# Altium PCB PCB1.PcbDoc (part 1 of 2)
Units mil, origin at the board's own origin, x right, y up, seen from the top; angles counter-clockwise.
Board outline 1637.83 x 850.42 mil, 4 copper layers (Top Layer, Signal Layer 1, Signal Layer 2, Bottom Layer), stack 30.634 mil thick; 87 components, 65 nets, 368 pads, 401 vias.
Unrouted connection lines stored in the file: 1.
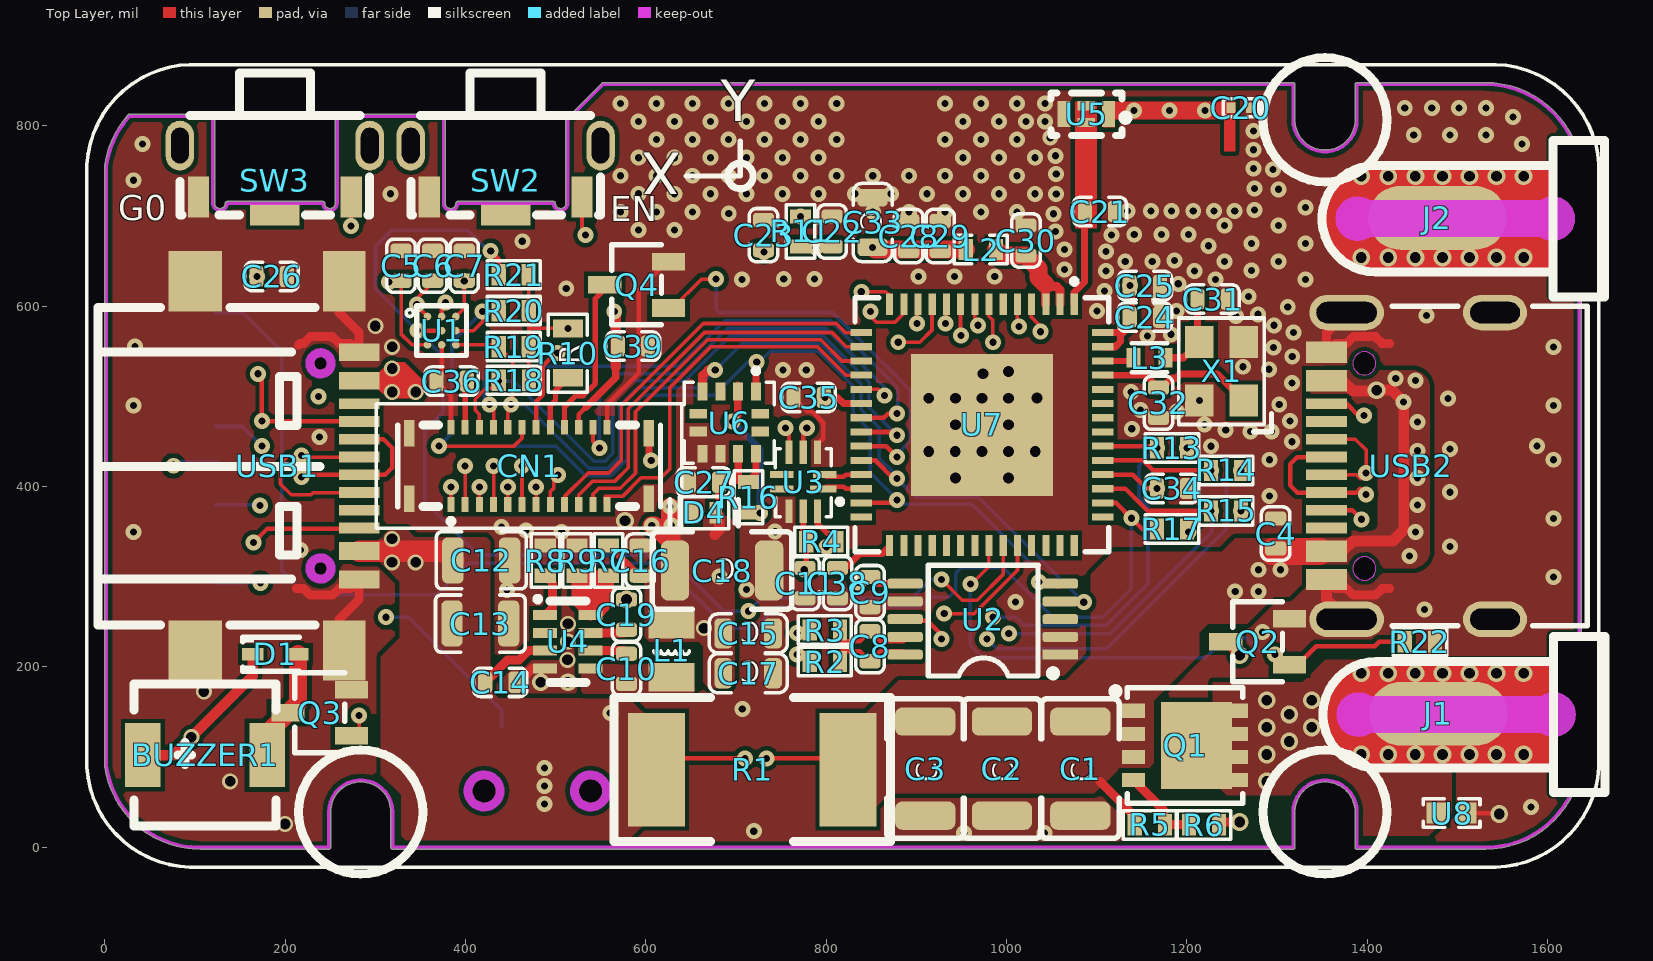
[diagram p0: Top Layer view]
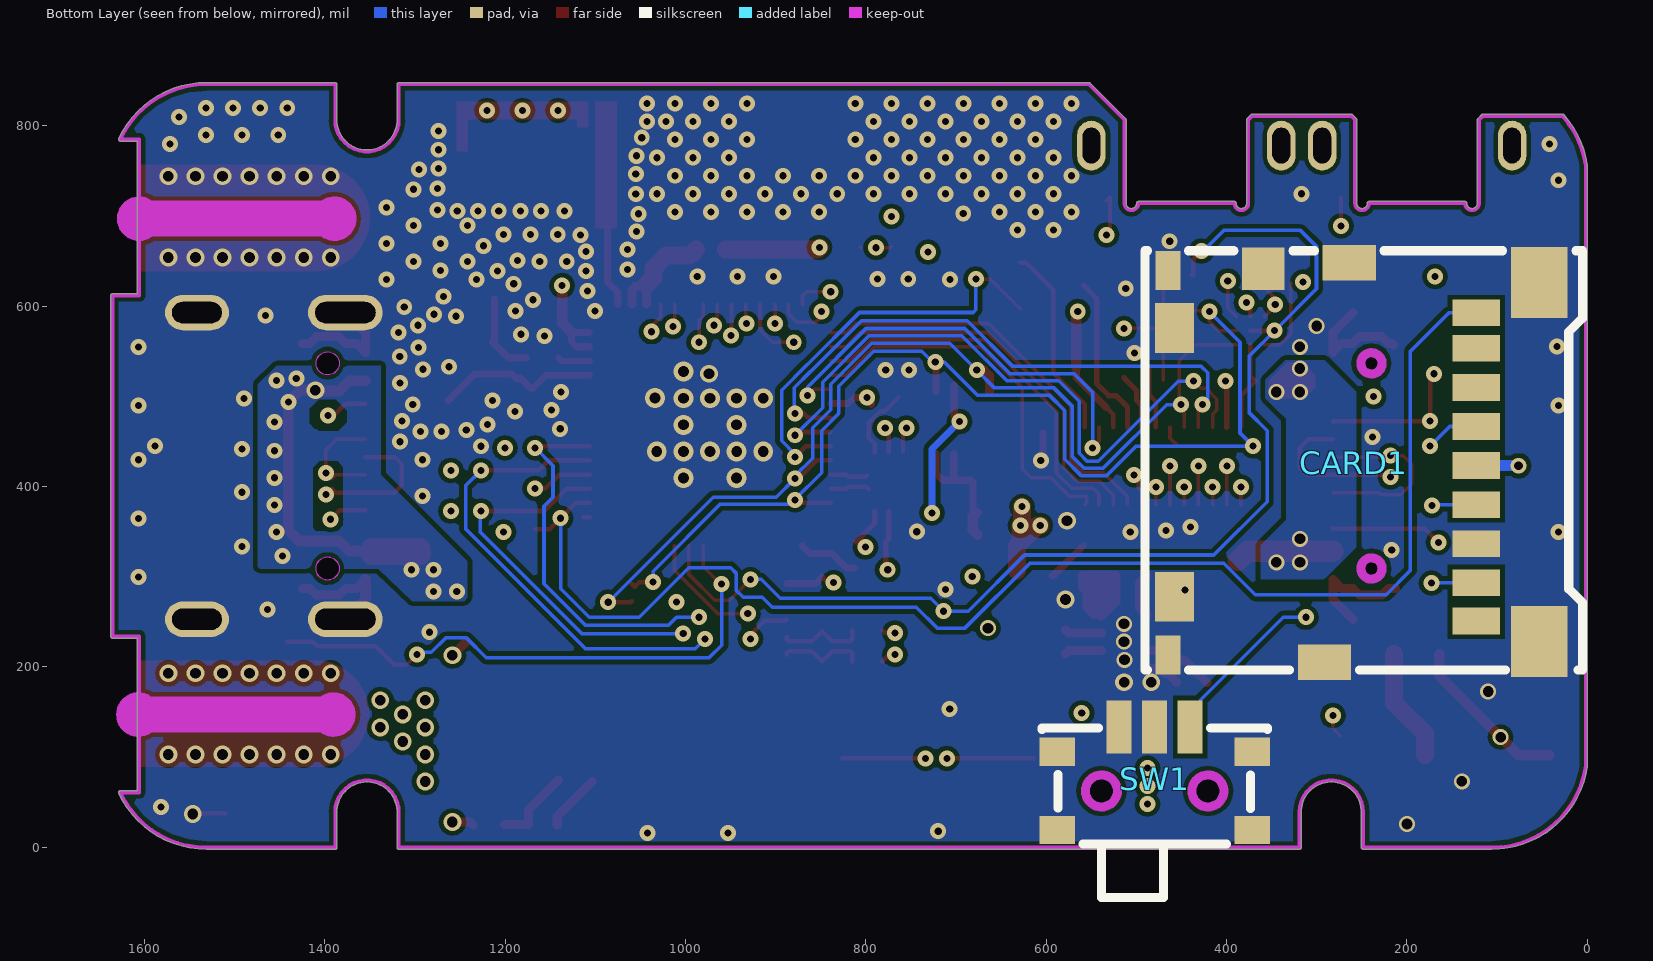
[diagram p1: Bottom Layer view, seen from below]
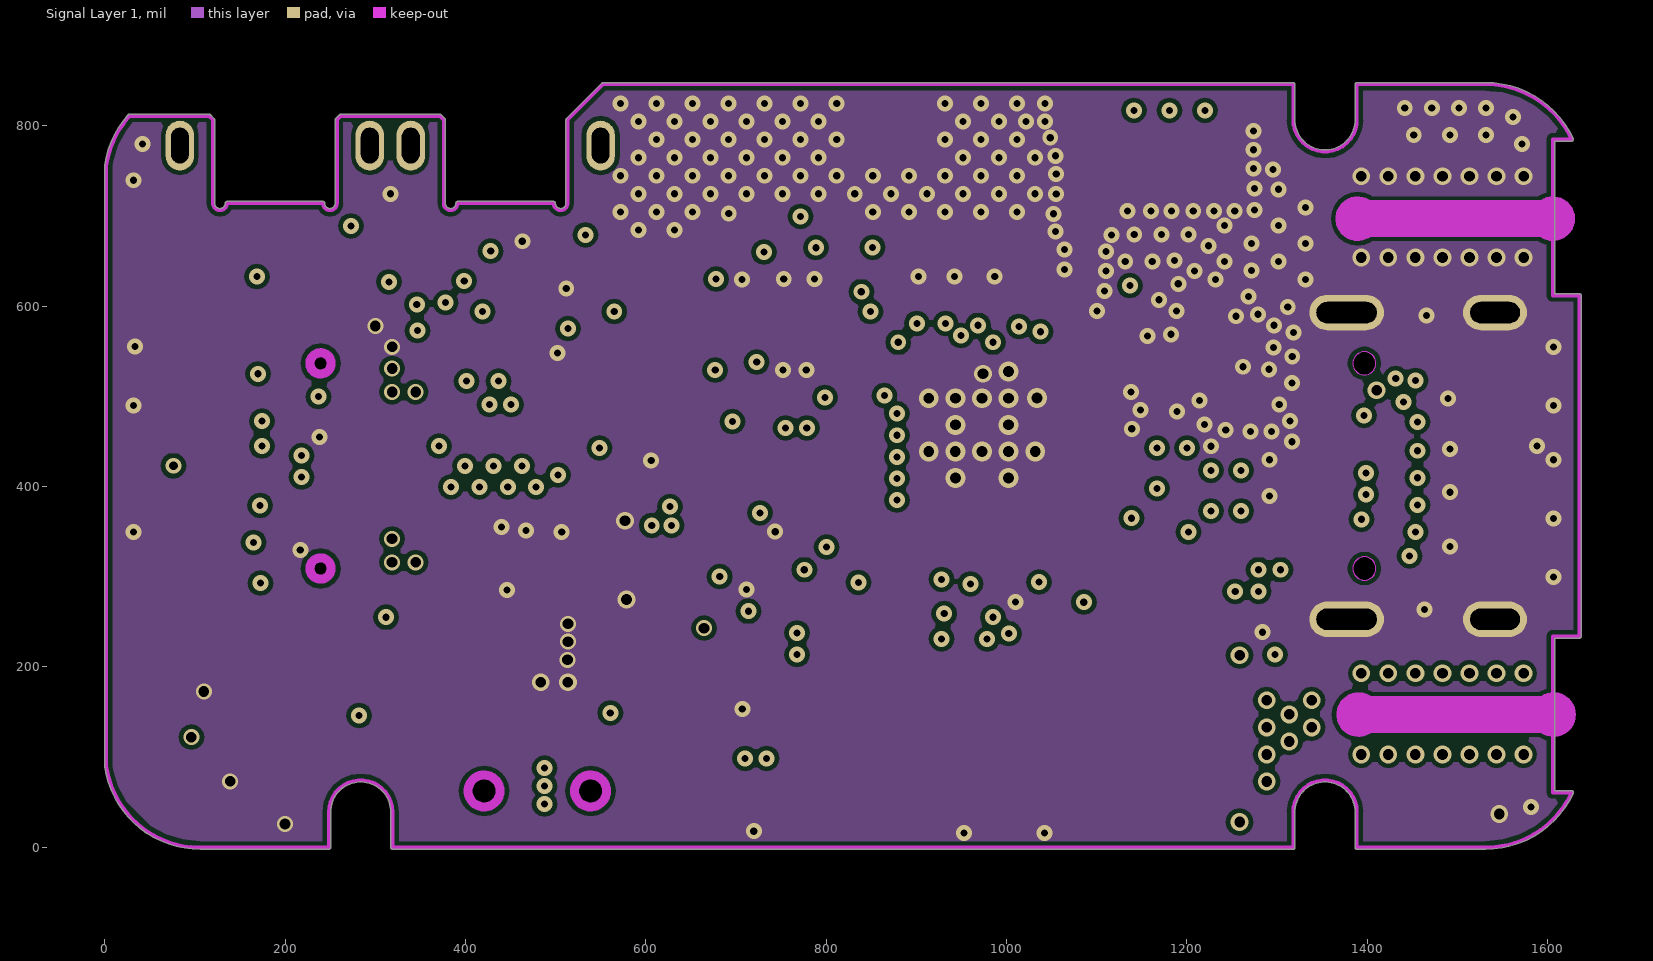
[diagram p2: Signal Layer 1]
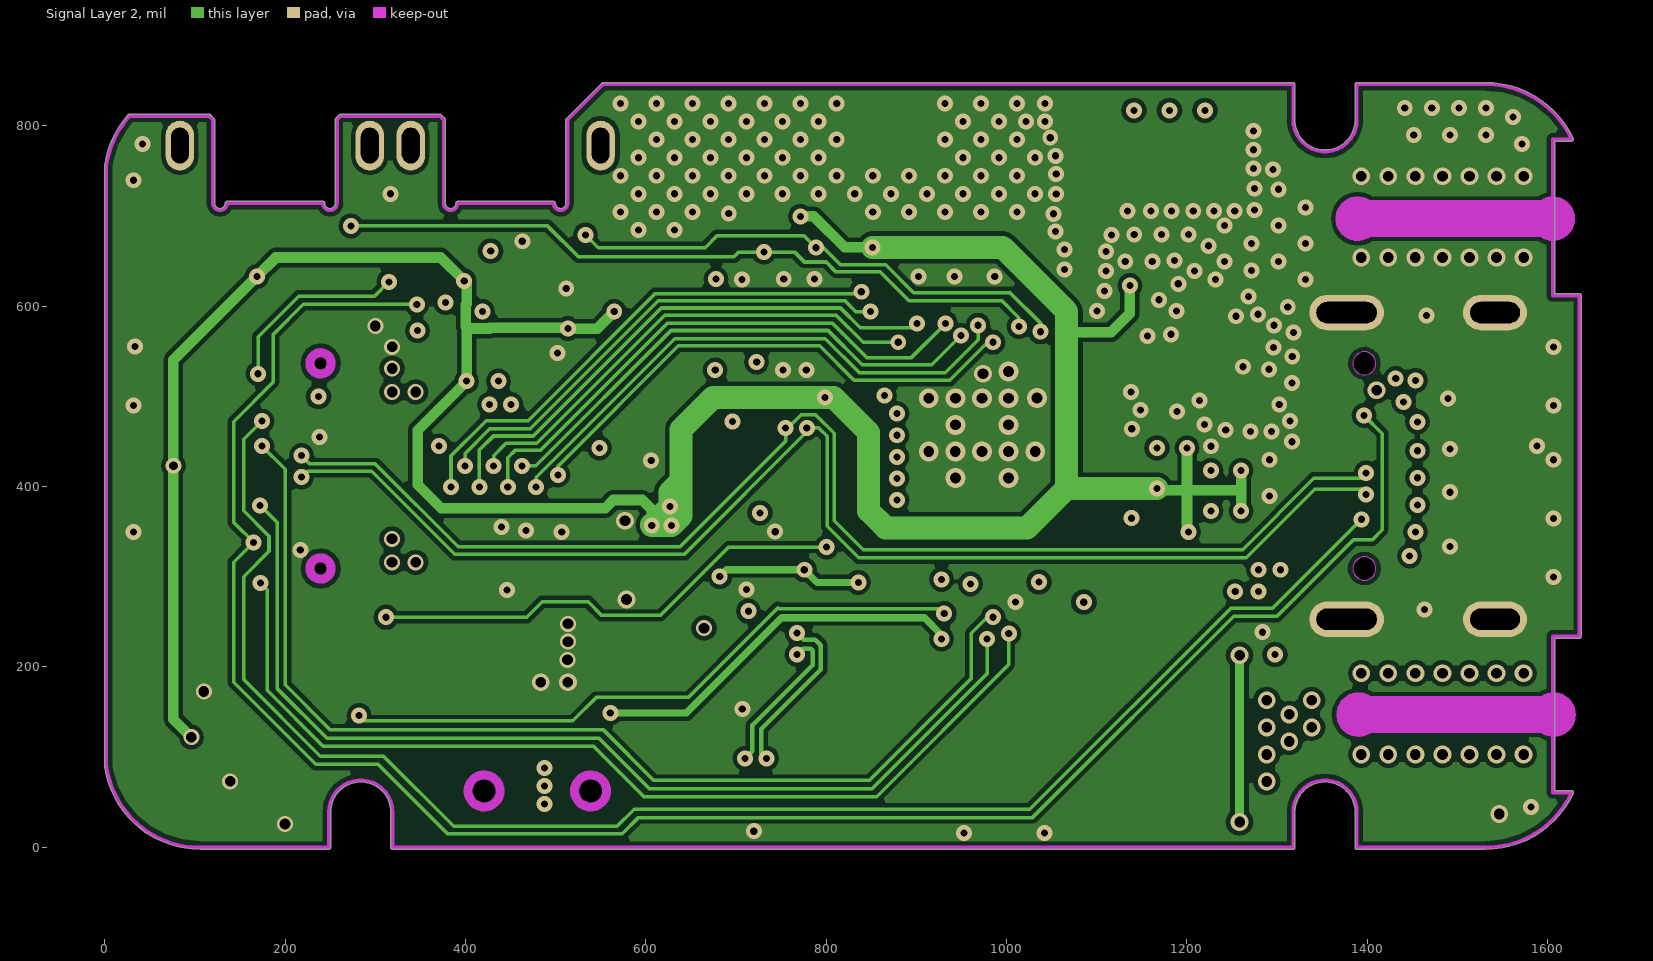
[diagram p3: Signal Layer 2]

## Layer stack, top to bottom
Top Solder: solder mask 0.4, Solder Resist, Dk 3.5
Top Layer: signal copper 1.4
Dielectric 1: core 10, FR-4, Dk 4.2
Signal Layer 1: signal copper 1.417
Dielectric 3: prepreg 5, Dk 4.2
Signal Layer 2: signal copper 1.417
Dielectric 2: core 10, Dk 4.2
Bottom Layer: signal copper 1.4
Bottom Solder: solder mask 0.4, Solder Resist, Dk 3.5

## Board outline
105.98,-2.38 248.39,-2.38 ccw(c248.39,-0.4) 250.37,-0.4 250.37,38.9 cw(c283.82,38.9) 317.27,38.9 317.27,-0.4 ccw(c319.25,-0.4) 319.25,-2.38 1317.91,-2.38 ccw(c1317.91,-0.4) 1319.9,-0.4 1319.9,38.9 cw(c1353.35,38.9) 1386.8,38.9 1386.8,-0.4 ccw(c1388.78,-0.4) 1388.78,-2.38 1531.18,-2.38 ccw(c1531.18,-0.4) 1531.2,-2.38 ccw(c1531.18,105.06) 1628.56,59.65 ccw(c1626.76,60.49) 1628.7,60.08 ccw(c1626.79,60.62) 1628.77,60.62 ccw(c1626.79,60.62) 1626.79,62.61 1607.97,62.61 1607.97,231.87 1635.51,231.87 ccw(c1635.51,233.85) 1637.5,233.85 1637.5,611.8 ccw(c1635.51,611.8) 1635.51,613.79 1607.97,613.79 1607.97,783.05 1626.79,783.05 ccw(c1626.79,785.03) 1628.77,785.03 ccw(c1626.79,785.03) 1628.7,785.58 ccw(c1626.76,785.17) 1628.55,786.01 ccw(c1531.18,740.6) 1531.2,848.04 ccw(c1531.18,846.06) 1531.18,848.04 1388.78,848.04 ccw(c1388.78,846.06) 1386.8,846.06 1386.8,806.76 cw(c1353.35,806.76) 1319.9,806.76 1319.9,846.06 ccw(c1317.91,846.06) 1317.91,848.04 552.84,848.04 ccw(c552.84,846.06) 551.42,847.45 551.43,847.46 512.06,808.09 512.07,808.1 ccw(c513.47,806.69) 511.48,806.69 511.48,714.17 cw(c505.59,714.17) 499.7,714.17 ccw(c497.72,714.17) 497.72,716.15 391.42,716.15 ccw(c391.42,714.17) 389.43,714.17 cw(c383.54,714.17) 377.65,714.17 377.65,806.69 ccw(c375.67,806.69) 377.06,808.1 377.07,808.09 372.82,812.34 372.83,812.33 ccw(c371.42,810.94) 371.42,812.92 261.81,812.92 ccw(c261.81,810.94) 260.4,812.33 260.41,812.34 256.16,808.09 256.17,808.1 ccw(c257.56,806.69) 255.58,806.69 255.58,714.17 cw(c249.69,714.17) 243.8,714.17 ccw(c241.81,714.17) 241.81,716.15 135.51,716.15 ccw(c135.51,714.17) 133.53,714.17 cw(c127.64,714.17) 121.75,714.17 121.75,806.69 ccw(c119.76,806.69) 121.16,808.1 121.17,808.09 116.91,812.34 116.93,812.33 ccw(c115.51,810.94) 115.51,812.92 27.46,812.92 ccw(c27.46,810.94) 25.98,812.26 ccw(c105.78,740.63) -0.31,756.25 ccw(c1.65,755.96) -0.33,755.96 ccw(c1.65,755.96) -0.33,755.96 -0.33,89.69 ccw(c1.65,89.69) -0.31,89.4 ccw(c105.98,105.06)

## Design rules (kind name [scope] priority, off if disabled: settings)
Clearance [All] p1: gap=4
ComponentClearance [All] p1 off: gap=10 collisioncheckmode=3 verticalgap=10 showdistances=FALSE
MinimumSolderMaskSliver [All] p1 off: minsoldermaskwidth=10
NetAntennae [All] p1 off: netantennaetolerance=0
PolygonConnect [All] p1: connectstyle=Direct reliefconductorwidth=10 reliefentries=4 polygonreliefangle="90 Angle" airgapwidth=10
RoutingVias [All] p1: holewidth=28 width=50 viastyle="Through Hole" minholewidth=7.87 minwidth=17.72 maxholewidth=28 maxwidth=50
SilkToSilkClearance [All] p1 off: silktosilkclearance=10
SilkToSolderMaskClearance [IsPad] p1 off: minsilkscreentomaskgap=10 clearancetoexposedcopper=TRUE
SolderMaskExpansion [All] p1: expansion=4
UnRoutedNet [All] p1 off:
Width [All] p1: maxlimit=100 minlimit=3 preferedwidth=10
24 further rules are at their usual default settings.

## Components (designator, comment, footprint, x,y, rotation, side; value= is the part's Value field where it differs from the comment)
BUZZER1 "4kHz" BUZ-SMD_L4.0-W4.0-P3.50-L 111.1,102 r0 top
C1 "22uF" C1206 1082,87.17 r90 top
C2 "22uF" C1206 995,87.17 r90 top
C3 "22uF" C1206 910,87.17 r90 top
C4 "100nF" C0402 1298.58,347.83 r270 top
C5 "470pF" C0402 328.58,644.83 r90 top
C6 "470pF" C0402 363.58,644.83 r270 top
C7 "100nF" C0402 398.58,644.83 r90 top
C8 "100nF" C0402 848.58,222.83 r270 top
C9 "100nF" C0402 848.58,282.83 r270 top
C10 "100nF" C0402 578.58,197.83 r90 top
C11 "100nF" C0402 776.58,292.83 r270 top
C12 "22uF" C0805 417.5,318 r180 top
C13 "22uF" C0805 416.5,248 r180 top
C14 "100nF" C0402 438.58,182.83 r0 top
C15 "22uF" C0603 713.56,237 r180 top
C16 "100nF" C0402 593.58,317.83 r90 top
C17 "22uF" C0603 713.58,192.83 r180 top
C18 "100uF" C1206 684.58,306.83 r180 top
C19 "33nF" C0402 578.58,257.83 r270 top
C20 "6.2pF" C0201 1260,820 r180 top
C21 "0.8pF" C0402 1103.73,705 r0 top
C22 "1uF" C0402 806.58,682.83 r270 top
C23 "100nF" C0402 730.58,678.83 r90 top
C24 "10nF" C0402 1153.58,587.83 r180 top
C25 "1uF" C0402 1153.58,622.83 r180 top
C26 "100nF" C0402 185,633 r0 top
C27 "100nF" C0402 664.58,404.83 r0 top
C28 "10uF" C0402 891.58,677.83 r270 top
C29 "1uF" C0402 926.58,677.83 r270 top
C30 "100nF" C0402 1021.58,672.83 r90 top
C31 "15pF" C0402 1228.58,607.83 r180 top
C32 "15pF" C0402 1168.58,492.83 r90 top
C33 "22uF" C0603 851.58,692.83 r270 top
C34 "100nF" C0402 1183.58,397.83 r0 top
C35 "100nF" C0402 780.58,498.83 r180 top
C36 "100nF" C0402 384.58,516.83 r180 top
C38 "10uF" C0402 812.58,292.83 r90 top
C39 "100nF" C0402 585.76,555.65 r0 top
CARD1 "5033981892" TF-SMD_TF-110 259.07,426.47 r90 bottom locked
CN1 "BM20B(0.8)-24DS-0.4V(51)" CONN-SMD_BM20B-0.8-24DS-0.4V-51 470.55,422.83 r0 top locked
D1 "1N4148WT" SOD-523_L1.2-W0.8-LS1.6-RD 189,214 r0 top
D4 "BDFN2C031V" TSSLP-2-4_L1.0-W0.6-P0.65-BI 664.58,370.83 r0 top
J1 "" ? 1607,147 r180 top
J2 "" ? 1605.98,697 r180 top
L1 "2.2uH" L0805 628.58,217.83 r90 top
L2 "2nH" L0402 971.58,662.83 r0 top
L3 "27nH" IND-SMD_L1.0-W0.5-2 1158.58,542.83 r0 top
Q1 "AON7405" DFN-8_L3.3-W3.3-P0.65-BL-3 1198.58,112.83 r270 top
Q2 "WNM6002-3/TR" SOT-323-3_L2.0-W1.3-P1.30-LS2.1-BR 1278.58,227.83 r0 top
Q3 "WNM6002-3/TR" SOT-323-3_L2.0-W1.3-P1.30-LS2.1-BR 238.35,149 r0 top
Q4 "WNM6002-3/TR" SOT-323-3_L2.0-W1.3-P1.30-LS2.1-BR 589.76,623.65 r0 top
R1 "10mΩ" RES-SMD_L6.3-W3.3_HOLR2512 718,86 r0 top
R2 "10Ω" R0402 798.58,205.83 r180 top
R3 "10Ω" R0402 798.58,240.83 r180 top
R4 "10kΩ" R0402 794.58,338.83 r180 top
R5 "100kΩ" R0402 1159.04,24.67 r180 top
R6 "1kΩ" R0402 1219.04,24.67 r180 top
R7 "30kΩ" R0402 558.58,317.83 r90 top
R8 "0Ω" R0402 488.58,317.83 r270 top
R9 "10kΩ" R0402 523.58,317.83 r270 top
R10 "4.7Ω" R0603 513.58,547.83 r90 top
R11 "10kΩ" R0402 771.58,682.83 r90 top
R13 "10kΩ" R0402 1183.58,442.83 r180 top
R14 "10kΩ" R0402 1243.58,417.83 r180 top
R15 "10kΩ" R0402 1243.58,372.83 r180 top
R16 "10kΩ" R0402 713.85,388.1 r90 top
R17 "10kΩ" R0402 1183.58,352.83 r0 top
R18 "4.7kΩ" R0402 453.58,517.83 r180 top
R19 "4.7kΩ" R0402 453.54,555.11 r180 top
R20 "4.7kΩ" R0402 453.54,594.99 r180 top
R21 "4.7kΩ" R0402 453.54,634.88 r180 top
R22 "4.7kΩ" R0402 1458.58,227.83 r180 top
SW1 "MINI MSK12CO2" SW-SMD_MSK12CO2 479.73,76.09 r180 bottom locked
SW2 "GT-TC021B-H018-L1" SW-SMD_GT-TC021B-H018-L1 444.57,739.76 r0 top
SW3 "GT-TC021B-H018-L1" SW-SMD_GT-TC021B-H018-L1 188.58,739.76 r0 top
U1 "FUSB302BUCX" WLCSP-9_L1.3-W1.2-R3-C3-P0.40-TL 373.58,572.83 r0 top
U2 "INA228AIDGST" VSSOP-10_L3.0-W3.0-P0.50-LS4.9-BL 973.58,252.83 r90 top
U3 "RS2227XUTQK10" WQFN-10_L1.8-W1.4-P0.40-BL 774.58,405.31 r90 top
U4 "TPS62933DRLR" SOT-583-8_L2.1-W1.2-P0.50-LS1.6-BR 513.58,227.83 r180 top
U5 "ANT162442ST-1000AM1" ANT-SMD_6P-L1.6-W0.8-L 1088.61,813 r180 top
U6 "LIS2DW12TR" LGA-12_L2.0-W2.0-P0.50-BL 692.58,470.83 r180 top
U7 "2.4GHz" QFN-56_L7.0-W7.0-P0.40-TL-EP4.0 972.86,468.39 r270 top locked
U8 "BDFN2C241R" DFN1006-2L-BI 1493.68,37.82 r180 top
USB1 "TYPEC-304A-ACP16O" USB-TYPE-C-SMD_TYPE-C-16P-QTWT 191.19,422.83 r270 top locked
USB2 "TYPEC-304A-ACP16O" USB-SMD_TYPEC-304A-ACP16O 1448.5,422.83 r90 top locked
X1 "40MHz" CRYSTAL-SMD_4P-L2.5-W2.0-BL 1238.58,527.83 r90 top

## Footprints (in the part's own frame and the unit in brackets; to place one, negate y for a bottom-side part, rotate by r counter-clockwise, add the part's x,y. Pads: shape width x height; smd on the part's side, far side on the other; paste and mask are expansions set on the pad)
ANT-SMD_6P-L1.6-W0.8-L [mm]
  rect 0.365x0.728 smd: 1(-0.625,0) 4(0.625,0)
  rect 0.5x0.26 smd paste+0 mask+0.05: 2(0,0.235) 5(0,-0.235)
  silkscreen extent -1.2,-0.6 1,0.6
BUZ-SMD_L4.0-W4.0-P3.50-L [mm]
  rect 1x1.8 smd: 1(-1.75,0) 2(1.75,0)
  silkscreen extent -2,-2 2,2
C0201 [mm]
  rect 0.25x0.3 smd: 1(-0.275,0) 2(0.275,0)
  silkscreen extent -0.5,-0.25 0.5,0.25
C0402 [mm]
  rrect50% 0.4x0.6 smd: 1(-0.425,0) 2(0.425,0)
  silkscreen extent -0.75,-0.4 0.75,0.4
C0603 [mm]
  rrect50% 0.5x0.85 smd: 1(-0.7,0) 2(0.7,0)
  silkscreen extent -1.1,-0.55 1.1,0.55
C0805 [mm]
  rrect50% 0.6x1.3 smd paste-100 mask+0.051: 1(-0.8,0) 2(0.8,0)
  silkscreen extent -1.26,-0.8 1.26,0.8
C1206 [mm]
  rrect50% 0.8x1.7 smd paste-100 mask+0.051: 1(-1.325,0) 2(1.325,0)
  silkscreen extent -1.96,-1.09 1.96,1.09
CONN-SMD_BM20B-0.8-24DS-0.4V-51 [mm]
  rect 0.2x0.42 smd: 1(-2.2,-1.09) 2(-1.8,-1.09) 3(-1.4,-1.09) 4(-1,-1.09) 5(-0.6,-1.09) 6(-0.2,-1.09) 7(0.2,-1.09) 8(0.6,-1.09) 9(1,-1.09) 10(1.4,-1.09) 11(1.8,-1.09) 12(2.2,-1.09) 13(2.2,1.09) 14(1.8,1.09) 15(1.4,1.09) 16(1,1.09) 17(0.6,1.09) 18(0.2,1.09) 19(-0.2,1.09) 20(-0.6,1.09) 21(-1,1.09) 22(-1.4,1.09) 23(-1.8,1.09) 24(-2.2,1.09)
  rect 0.3x0.75 smd: 25(3.375,-0.925) 26(3.375,0.925) 27(-3.375,-0.925) 28(-3.375,0.925)
  silkscreen extent -3.7,-1.64 3.7,1.15
CRYSTAL-SMD_4P-L2.5-W2.0-BL [mm]
  rect 0.9x0.8 smd: 1(-0.825,-0.625) 2(0.825,-0.625) 3(0.825,0.625) 4(-0.825,0.625)
  silkscreen extent -1.7,-1.41 1.5,1.2
DFN1006-2L-BI [mm]
  rect 0.55x0.6 smd: 1(-0.425,0) 2(0.425,0)
  silkscreen extent -0.8,-0.4 0.8,0.4
DFN-8_L3.3-W3.3-P0.65-BL-3 [mm]
  rect 0.4x0.65 smd paste-100 mask+0.05: 1(-0.975,-1.463) 2(-0.325,-1.463) 3(0.325,-1.463) 4(0.975,-1.463)
  rect 0.4x0.6 smd paste-100 mask+0.05: 5(0.975,1.463) 6(0.325,1.463) 7(-0.325,1.463) 8(-0.975,1.463)
  rect 2.45x2 smd paste-100 mask+0.05: 9(0,0.312)
  silkscreen extent -1.62,-2.07 1.62,1.61
IND-SMD_L1.0-W0.5-2 [mm]
  rect 0.4x0.55 smd: 1(-0.45,0) 2(0.45,0)
  silkscreen extent -0.5,-0.41 0.5,0.41
L0402 [mm]
  rect 0.4x0.6 smd: 1(-0.425,0) 2(0.425,0)
  silkscreen extent -0.75,-0.4 0.75,0.4
L0805 [mm]
  rect 0.8x1.3 smd paste-100 mask+0.051: 1(-0.75,0) 2(0.75,0)
  silkscreen extent -0.1,-0.5 0,0.5
LGA-12_L2.0-W2.0-P0.50-BL [mm]
  rect 0.28x0.5 smd: 1(-0.75,-0.875) 2(-0.25,-0.875) 3(0.25,-0.875) 4(0.75,-0.875) 7(0.75,0.875) 8(0.25,0.875) 9(-0.25,0.875) 10(-0.75,0.875)
  rect 0.5x0.28 smd: 5(0.875,-0.25) 6(0.875,0.25) 11(-0.875,0.25) 12(-0.875,-0.25)
  silkscreen extent -1.27,-1.53 1.27,1.14
QFN-56_L7.0-W7.0-P0.40-TL-EP4.0 [mm]
  rect 0.6x0.2 smd paste-100 mask+0.051: 1(-3.4,2.6) 2(-3.4,2.2) 3(-3.4,1.8) 4(-3.4,1.4) 5(-3.4,1) 6(-3.4,0.6) 7(-3.4,0.2) 8(-3.4,-0.2) 9(-3.4,-0.6) 10(-3.4,-1) 11(-3.4,-1.4) 12(-3.4,-1.8) 13(-3.4,-2.2) 14(-3.4,-2.6) 29(3.4,-2.6) 30(3.4,-2.2) 31(3.4,-1.8) 32(3.4,-1.4) 33(3.4,-1) 34(3.4,-0.6) 35(3.4,-0.2) 36(3.4,0.2) 37(3.4,0.6) 38(3.4,1) 39(3.4,1.4) 40(3.4,1.8) 41(3.4,2.2) 42(3.4,2.6)
  rect 0.2x0.6 smd paste-100 mask+0.051: 15(-2.6,-3.4) 16(-2.2,-3.4) 17(-1.8,-3.4) 18(-1.4,-3.4) 19(-1,-3.4) 20(-0.6,-3.4) 21(-0.2,-3.4) 22(0.2,-3.4) 23(0.6,-3.4) 24(1,-3.4) 25(1.4,-3.4) 26(1.8,-3.4) 27(2.2,-3.4) 28(2.6,-3.4) 43(2.6,3.4) 44(2.2,3.4) 45(1.8,3.4) 46(1.4,3.4) 47(1,3.4) 48(0.6,3.4) 49(0.2,3.4) 50(-0.2,3.4) 51(-0.6,3.4) 52(-1,3.4) 53(-1.4,3.4) 54(-1.8,3.4) 55(-2.2,3.4) 56(-2.6,3.4)
  rect 1x1 smd paste+0 mask+0: 57(-1.5,1.5) 57(-1.5,0) 57(-1.5,-1.499) 57(0,-1.499) 57(0,1.5) 57(1.5,1.5) 57(1.5,0) 57(1.5,-1.5)
  rect 4x4 smd paste-100 mask-100: 57(0,0)
  silkscreen extent -4.11,-3.58 3.58,3.58
R0402 [mm]
  rect 0.4x0.6 smd: 1(-0.425,0) 2(0.425,0)
  silkscreen extent -0.75,-0.4 0.75,0.4
R0603 [mm]
  rect 0.5x0.85 smd paste-0.05 mask+0.051: 1(-0.694,0) 2(0.694,0)
  silkscreen extent -1.1,-0.55 1.1,0.55
RES-SMD_L6.3-W3.3_HOLR2512 [mm]
  rect 1.6x3.2 smd: 1(-2.7,0) 2(2.7,0)
  silkscreen extent -3.9,-2.03 3.9,2.03
SOD-523_L1.2-W0.8-LS1.6-RD [mm]
  rect 0.6x0.36 smd: 1(-0.635,0) 2(0.635,0)
  silkscreen extent -0.91,-0.55 0.68,0.55
SOT-323-3_L2.0-W1.3-P1.30-LS2.1-BR [mm]
  rect 0.936x0.5 smd: 1(0.898,-0.65) 2(0.898,0.65) 3(-0.898,0)
  silkscreen extent -0.7,-1.13 0.7,1.13
SOT-583-8_L2.1-W1.2-P0.50-LS1.6-BR [mm]
  rect 0.68x0.28 smd: 1(0.64,-0.75) 2(0.64,-0.25) 3(0.64,0.25) 4(0.64,0.75) 5(-0.64,0.75) 6(-0.64,0.25) 7(-0.64,-0.25) 8(-0.64,-0.75)
  silkscreen extent -0.51,-1.27 0.92,1.14
SW-SMD_GT-TC021B-H018-L1 [mm]
  rect 0.6x1.15 smd paste-100 mask+0.051: 1(-2.15,-0.475) 2(2.15,-0.475)
  oval 0.8x1.4 hole 0.5 slot 1 at 90 deg: 3(-2.675,0.975) 4(2.675,0.975)
  rect 1.4x0.6 smd paste-100 mask+0.051: 3(0,-0.975)
  silkscreen extent -2.67,-0.97 2.67,3.03
SW-SMD_MSK12CO2 [mm]
  rect 0.7x1.5 smd: 1(-1,1.45) 2(0,1.45) 3(1,1.45)
  rect 1x0.8 smd: 4(-2.75,-1.45) 4(-2.75,0.75) 5(2.75,-1.45) 5(2.75,0.75)
  Keep-Out Layer board cut-out: 1.95,-0.35 1.888,-0.127 1.724,0.036 1.5,0.095 1.277,0.036 1.112,-0.127 1.05,-0.35 1.05,-0.35 1.112,-0.573 1.277,-0.736 1.5,-0.795 1.724,-0.736 1.888,-0.573 1.95,-0.35 1.95,-0.35
  Keep-Out Layer board cut-out: -1.05,-0.35 -1.112,-0.127 -1.276,0.036 -1.5,0.095 -1.723,0.036 -1.888,-0.127 -1.95,-0.35 -1.95,-0.35 -1.888,-0.573 -1.723,-0.736 -1.5,-0.795 -1.276,-0.736 -1.112,-0.573 -1.05,-0.35 -1.05,-0.35
  Multi-Layer keep-out circle w0.254: c1.5,-0.35 r0.45
  Multi-Layer keep-out circle w0.254: c-1.5,-0.35 r0.45
  silkscreen extent -3.17,-3.35 3.17,1.43
TF-SMD_TF-110 [mm]
  rect 0.75x1.35 smd: 1(3.218,-3.455) 2(2.117,-3.455) 3(1.018,-3.455) 4(-0.082,-3.455) 5(-1.182,-3.455) 6(-2.282,-3.455) 7(-3.382,-3.455) 8(-4.462,-3.455) 9(4.218,-3.455)
  rect 1.2x1.2 smd: 10(5.465,2.545)
  rect 1x1.5 smd: 11(-5.631,0.82) 11(5.631,0.12)
  rect 1.1x0.7 smd: 11(-5.414,5.23) 11(5.414,5.23)
  rect 2x1.6 smd: 11(-5.032,-5.23) 11(5.068,-5.23)
  rect 1.4x1.1 smd: 11(-3.782,5.045) 11(3.794,5.045)
  silkscreen extent -5.84,-6.44 5.97,5.88
TSSLP-2-4_L1.0-W0.6-P0.65-BI [mm]
  rect 0.35x0.6 smd: 1(-0.325,0) 2(0.325,0)
  silkscreen extent -0.96,-0.45 0.96,0.45
USB-SMD_TYPEC-304A-ACP16O [mm]
  oval 1x2.1 hole 0.6 slot 1.7 at 90 deg paste+0 mask+0.05: 12(-4.32,1.808) 13(4.32,1.808)
  oval 1x1.8 hole 0.6 slot 1.4 at 90 deg paste+0 mask+0.05: 14(-4.32,-2.372) 15(4.32,-2.372)
  rect 0.6x1.15 smd paste-100 mask+0.05: A1B12(-3.2,2.372) A4B9(-2.4,2.372) B1A12(3.2,2.372) B4A9(2.4,2.372)
  rect 0.3x1.15 smd paste-100 mask+0.05: A5(-1.25,2.372) A6(-0.25,2.372) A7(0.25,2.372) A8(1.25,2.372) B5(1.75,2.372) B6(0.75,2.372) B7(-0.75,2.372) B8(-1.75,2.372)
  Keep-Out Layer circle w0.005: c-2.89,1.307 r0.325
  Keep-Out Layer circle w0.005: c2.89,1.307 r0.325
  Keep-Out Layer board cut-out: -2.89,1.632 -2.955,1.632 -3.074,1.583 -3.166,1.492 -3.215,1.372 -3.215,1.243 -3.166,1.123 -3.074,1.032 -2.955,0.982 -2.89,0.982 -2.825,0.982 -2.706,1.032 -2.615,1.123 -2.565,1.243 -2.565,1.372 -2.614,1.492 -2.706,1.583 -2.825,1.632 -2.89,1.632 -2.89,1.632
  Keep-Out Layer board cut-out: 2.89,1.632 2.825,1.632 2.706,1.583 2.614,1.492 2.565,1.372 2.565,1.243 2.614,1.123 2.706,1.032 2.825,0.982 2.89,0.982 2.955,0.982 3.074,1.032 3.166,1.123 3.215,1.243 3.215,1.372 3.166,1.492 3.074,1.583 2.955,1.632 2.89,1.632 2.89,1.632
  silkscreen extent -4.5,-4.97 4.5,0.53
USB-TYPE-C-SMD_TYPE-C-16P-QTWT [mm]
  rect 1.7x1.2 smd: 0(-5.2,1.891) 0(5.2,1.891)
  rect 1.7x1.5 smd: 0(-5.2,-2.309) 0(5.2,-2.309)
  rect 0.5x1.14 smd: A1(-3.2,2.308) A4(-2.4,2.308) A9(2.4,2.308) A12(3.2,2.308)
  rect 0.3x1.14 smd: A5(-1.25,2.308) A6(-0.25,2.308) A7(0.25,2.308) A8(1.25,2.309) B5(1.75,2.308) B6(0.75,2.308) B7(-0.75,2.308) B8(-1.75,2.309)
  Keep-Out Layer board cut-out: 3.19,1.221 3.148,1.369 3.039,1.477 2.89,1.517 2.741,1.477 2.632,1.369 2.59,1.221 2.59,1.221 2.632,1.073 2.741,0.965 2.89,0.925 3.039,0.965 3.148,1.073 3.19,1.221 3.19,1.221
  Keep-Out Layer board cut-out: -2.59,1.221 -2.632,1.369 -2.741,1.477 -2.89,1.517 -3.039,1.477 -3.148,1.369 -3.19,1.221 -3.19,1.221 -3.148,1.073 -3.039,0.965 -2.89,0.925 -2.741,0.965 -2.632,1.073 -2.59,1.221 -2.59,1.221
  Multi-Layer keep-out circle w0.254: c2.89,1.221 r0.3
  Multi-Layer keep-out circle w0.254: c-2.89,1.221 r0.3
  silkscreen extent -4.46,-5.05 4.48,1.2
VSSOP-10_L3.0-W3.0-P0.50-LS4.9-BL [mm]
  rect 0.28x1 smd paste+0 mask+0.015: 1(-1,-2.186)
  rrect50% 0.28x1 smd paste+0 mask+0.015: 2(-0.5,-2.186) 3(0,-2.186) 4(0.5,-2.186) 5(1,-2.186)
  rrect50% 0.28x1 smd: 6(1,2.186) 7(0.5,2.186) 8(0,2.186) 9(-0.5,2.186) 10(-1,2.186)
  silkscreen extent -1.62,-2.08 1.52,1.54
WLCSP-9_L1.3-W1.2-R3-C3-P0.40-TL [mm]
  round 0.215 smd paste-100 mask+0.051: A1(-0.4,0.4) A2(0,0.4) A3(0.4,0.4) B2(0,0) B3(0.4,0) C1(-0.4,-0.4) C2(0,-0.4) C3(0.4,-0.4)
  silkscreen extent -1,-0.7 0.7,0.7
WQFN-10_L1.8-W1.4-P0.40-BL [mm]
  rect 0.2x0.75 smd: 1(-0.2,-0.565)
  rect 0.2x0.665 smd: 2(0.2,-0.608) 6(0.2,0.608) 7(-0.2,0.608)
  rect 0.665x0.2 smd: 3(0.832,-0.4) 4(0.832,0) 5(0.832,0.4) 8(-0.832,0.4) 9(-0.832,0) 10(-0.832,-0.4)
  silkscreen extent -0.99,-1.11 0.93,0.79
? [mm]
  oval 3.9x1.8 smd: 1(3.25,-0.024)
  Top Layer region: 5,-1.524 5.574,-1.41 6.061,-1.085 6.386,-0.598 6.5,-0.024 6.5,-0.024 6.386,0.55 6.061,1.037 5.574,1.362 5,1.476 5,1.476 0,1.476 0,-1.524 5,-1.524
  Keep-Out Layer board cut-out: 0,-0.5 5.5,-0.5 5.5,0.5 0,0.5 0,-0.5
  Keep-Out Layer board cut-out: 5,0 5.05,-0.217 5.188,-0.391 5.389,-0.488 5.611,-0.488 5.812,-0.391 5.951,-0.217 6,0 6,0 5.951,0.217 5.812,0.391 5.611,0.487 5.389,0.487 5.188,0.391 5.05,0.217 5,0 5,0
  Keep-Out Layer board cut-out: -0.5,0 -0.433,-0.25 -0.25,-0.432 0,-0.499 0.25,-0.432 0.433,-0.25 0.5,0 0.5,0 0.433,0.249 0.25,0.432 0,0.499 -0.25,0.432 -0.433,0.25 -0.5,0 -0.5,0
  Keep-Out Layer lines w1: 5.5,0 0,0 5.5,0
  Multi-Layer keep-out circle w0.254: c5.5,0 r0.5
  Multi-Layer keep-out circle w0.254: c0,0 r0.5
  Multi-Layer keep-out region: 0,-0.5 5.5,-0.5 5.5,0.5 0,0.5 0,-0.5
  silkscreen extent -1.45,-2.2 6.5,2.2

## Part data
BUZZER1: library part FUET-4020, "驱动方式:无源(外部驱动);构造类型:电磁式;频率:4kHz;声压(SPL):65dB@3V,10cm;"
C1 C2 C3: library part HGC1206R5226K250NSPJ, "容值:22uF;精度:±10%;额定电压:25V;材质(温度系数):X5R;"
C4 C7 C8 C9 C10 C11 C14 C16 C23 C26 C27 C30 C34 C35 C36 C39: library part CL05B104KB54PNC, "容值:100nF;精度:±10%;额定电压:50V;材质(温度系数):X7R;"
C5 C6: library part 0402B471K500NT, "容值:470pF;精度:±10%;额定电压:50V;材质(温度系数):X7R;"
C12 C13: library part CL21A226MAYNNNE, "容值:22uF;精度:±20%;额定电压:25V;材质(温度系数):X5R;"
C15 C17 C33: library part CL10A226MP8NUNE, "容值:22uF;精度:±20%;额定电压:10V;材质(温度系数):X5R;"
C18: library part CL31A107MQHNNNE, "容值:100uF;精度:±20%;额定电压:6.3V;材质(温度系数):X5R;"
C19: library part CC0402KRX7R9BB333, "容值:33nF;精度:±10%;额定电压:50V;材质(温度系数):X7R;"
C20 C21: library part GJM0335C1ER80WB01D, "容值:0.8pF;额定电压:25V;材质(温度系数):C0G;"
C22 C25 C29: library part CL05A105KP5NNNC, "容值:1uF;精度:±10%;额定电压:10V;材质(温度系数):X5R;"
C24: library part CL05B103KB5NNNC, "容值:10nF;精度:±10%;额定电压:50V;材质(温度系数):X7R;"
C28 C38: library part CL05A106MQ5NUNC, "容值:10uF;精度:±20%;额定电压:6.3V;材质(温度系数):X5R;"
C31 C32: library part 0402CG150J500NT, "容值:15pF;精度:±5%;额定电压:50V;材质(温度系数):C0G;"
CARD1: "卡连接方式:自弹式;卡类型:MicroSD卡(TF卡);连接器类型:卡座;本体最大高度:1.28mm;触头镀层:金;工作温度范围:-25℃~+85℃;"
CN1: "PIN总数:-;间距:0.4mm;公母:母;安装方式:立贴;行数:2;额定电流:300mA;工作温度范围:-35℃~+85℃;"
D1: library part 1N4148WT_C727112, "二极管配置:独立式;正向压降(Vf):1.25V@150mA;直流反向耐压(Vr):75V;平均整流电流(Io):125mA;反向恢复时间(trr):4ns;"
D4: "反向截止电压(Vrwm):3.3V;最大钳位电压:8V;峰值脉冲电流(Ipp)@10/1000us:11A@8/20us;击穿电压:3.7V;"
J1 J2: library part Banana_M2xφ4.4x7, "K2台阶插座,Banana_M2xφ4.4x7"
L1: library part MLP2012H2R2MT0S1, "电感值:2.2uH;精度:±20%;额定电流:1A;"
L2: library part SDCL1005C2N0STDF, "电感值:2nH;精度:-;额定电流:300mA;饱和电流(Isat):-;直流电阻(DCR):200mΩ;"
L3: library part LQW15AN27NG00D, "电感值:27nH;精度:±2%;额定电流:280mA;饱和电流(Isat):-;"
Q1: "类型:1个P沟道;漏源电压(Vdss):30V;连续漏极电流(Id):50A;功率(Pd):6.25W;导通电阻(RDS(on)@Vgs,Id):6.2mΩ@10V,20A;阈值电压(Vgs(th)@Id):2.8V@250uA;"
Q2 Q3 Q4: "类型:N沟道;漏源电压(Vdss):60V;连续漏极电流(Id):300mA;功率(Pd):370mW;导通电阻(RDS(on)@Vgs,Id):2Ω@10V,370mA;阈值电压(Vgs(th)@Id):2V@250uA;"
R1: library part HoLR2512-1W-10mR-1%-15ppm, "电阻类型:采样电阻;阻值:10mΩ;精度:±1%;功率:1W;温度系数:±15ppm/℃;安装方式:贴片;"
R2 R3: library part 0402WGF100JTCE, "电阻类型:厚膜电阻;阻值:10Ω;精度:±1%;功率:62.5mW;最大工作电压:50V;温度系数:±200ppm/℃;"
R4 R9 R11 R13 R14 R15 R16 R17: library part 0402WGF1002TCE, "电阻类型:厚膜电阻;阻值:10kΩ;精度:±1%;功率:62.5mW;最大工作电压:50V;温度系数:±100ppm/℃;"
R5: library part 0402WGF1003TCE, "电阻类型:厚膜电阻;阻值:100kΩ;精度:±1%;功率:62.5mW;最大工作电压:50V;温度系数:±100ppm/℃;"
R6: library part 0402WGF1001TCE, "电阻类型:厚膜电阻;阻值:1kΩ;精度:±1%;功率:62.5mW;最大工作电压:50V;温度系数:±100ppm/℃;"
R7: library part 0402WGF3002TCE, "电阻类型:厚膜电阻;阻值:30kΩ;精度:±1%;功率:62.5mW;最大工作电压:50V;温度系数:±100ppm/℃;"
R8: library part 0402WGF0000TCE, "电阻类型:厚膜电阻;阻值:0Ω;精度:±1%;功率:62.5mW;最大工作电压:50V;温度系数:±800ppm/℃;"
R10: library part 0603WAF470KT5E, "电阻类型:厚膜电阻;阻值:4.7Ω;精度:±1%;功率:100mW;最大工作电压:75V;温度系数:±400ppm/℃;"
R18 R19 R20 R21 R22: library part 0402WGF4701TCE, "电阻类型:厚膜电阻;阻值:4.7kΩ;精度:±1%;功率:62.5mW;最大工作电压:50V;温度系数:±100ppm/℃;"
SW1: "电路结构:单刀双掷;安装方式:卧贴;开关颜色:-;额定电流(DC):50mA;额定电压(DC):12V;额定电流(AC):-;额定电压(AC):-;机械寿命:1万次;"
SW2 SW3: "电路结构:单刀单掷;按钮形状:矩形按钮;作用力:250gf;安装方式:卧贴;开关长度:5.6mm;开关宽度:4mm;开关高度:1.8mm;带支架:带支架;触点电流:50mA;额定电压(DC):12V;绝缘电阻:100MΩ;带灯:无;机械寿命:5万次;"
U1: "应用功能:控制器;接口协议:USB;"
U3: "开关电路:-;"
U4: "功能类型:降压型;输出类型:可调;输入电压:3.8V~30V;输出电压:800mV~22V;输出电流(最大值):3A;"
U5: "天线类型:芯片天线;中心频点:2.442GHz;驻波比:3;"
U7: library part ESP32-S3FH4R2, "核心处理器:LX7芯片;频率:2.4GHz;天线形式:-;发射功率:21dBm;接收灵敏度:-;"
U8: "反向截止电压(Vrwm):24V;"
USB1 USB2: "连接器类型:Type-C;标准:USB 3.1;公母:母;端口数量:1;触点数量:16P;安装方式:卧贴;额定电流 - 电源:5A;触头材质:-;触头镀层:-;工作温度范围:-45℃~+85℃;焊接温度(最大值):260℃;"
X1: library part TXM40M0004252HBCEO00T, "晶振类型:贴片晶振;频率:40MHz;常温频差:±10ppm;外接负载电容:15pF;频率稳定度(全温):±30ppm;"

## Via types
v1: diameter 17.72, hole 7.87, Top Layer to Bottom Layer, 324 vias
v2: diameter 19.68, hole 11.81, Top Layer to Bottom Layer, 43 vias
v3: diameter 17.72, hole 11.81, Top Layer to Bottom Layer, 16 vias
v4: diameter 22, hole 12, Top Layer to Bottom Layer, 15 vias
v5: diameter 19.68, hole 12.01, Top Layer to Bottom Layer, 2 vias
v6: diameter 17.72, hole 9.84, Top Layer to Bottom Layer, 1 vias

## Nets (pads, with @x,y where several pads share a name; then routed paths per layer and width w, separated by ;. In a path a pad name is that pad's centre, name@x,y a point inside that pad or via, vN(x,y) a via of type N, cw(c..) or ccw(c..) an arc to the next point about the centre after c; other vN are vias at no path point)
+3V3: BUZZER1.1 C7.1 C9.1 C11.1 C15.2 C16.1 C17.2 C18.2 C24.2 C25.2 C26.1 C27.2 C28.2 C29.2 C33.2 C34.1 C35.1 C36.1 C39.1 CARD1.4 CN1.15 CN1.23 D1.1 D4.2 L1.2 L2.1 R4.2 R7.2 R10.2 R11.2 R13.1 R14.1 R15.1 R16.2 R17.2 R18.1 R19.1 R20.1 R21.1 U1.A3 U2.6 U3.9 U6.9 U6.10 U7.20 U7.46 U7.55 U7.56 | length 4883.1
  Top Layer w3.94: v1(835.76,293.65) 842.68,293.65 C9.1@848.58,299.56
  Top Layer w4: U1.A3@389.33,588.57 398.58,597.83 C7.1@398.58,626.1 ; R18.1@470.32,517.83 470.32,575.69 ; R21.1@470.32,634.84 470.32,575.69 ; v1(513.58,575.15) 513.04,575.69 470.32,575.69
  Top Layer w5: CN1.15@525.67,465.74 525.67,479.91 533.56,487.8 ; U7.46@1106.45,413.19 1140.22,413.19 1155.58,397.83 v1(1166.85,397.83)
  Top Layer w5.91: CN1.23@399.69,465.74 399.69,515.2 v1(401.32,516.83)
  Top Layer w6.02: U3.9@774.58,372.54 774.58,342.1 R4.2@777.85,338.83 777.85,310.83 C11.1@776.58,309.56
  Top Layer w7.87: C35.1@793.58,491.1 793.58,493.83 v1(798.58,498.83) 812.58,498.83 819.48,491.93 U7.20@838.74,491.93 ; C9.1@848.58,299.56 855.95,292.19 U2.6@887.52,292.19
  Top Layer w8: 533.56,487.8 566.76,521 566.76,532.99 ; R7.2@558.58,334.56 592.05,301.1 C16.1@593.58,301.1 ; D4.2@677.38,370.83 681.32,374.77 C27.2@681.32,404.83 683.32,406.83 698.58,406.83 ; U6.9@702.42,436.38 702.42,410.67 698.58,406.83 ; U6.10@722.11,436.38 722.11,414.36 714.58,406.83 698.58,406.83 ; U7.55@1106.45,554.93 1120.69,554.93 1126.58,560.83 1126.58,570.52 1126.43,570.67 U7.56@1106.45,570.67
  Top Layer w11.81: BUZZER1.1@42.2,102 76,102 v3(96,122) 164,190 D1.1@164,214 ; 676.58,346.83 681.38,351.62 681.38,366.83 D4.2@677.38,370.83 ; 1126.43,570.67 1136.85,581.1 C24.2@1136.85,587.83 v1(1136.85,622.83)
  Top Layer w12: v1(565,594) 566.76,592.24 566.76,532.99
  Top Layer w20: v1(606.58,356.83) 609.72,356.83 C18.2@626.78,339.77 ; v1(626.78,377.79) C18.2@626.78,339.77 ; v1(628.58,356.83) C18.2@628.58,337.97 ; C18.2@632.42,306.83 632.42,334.13 C18.2@628.58,337.97 ; v1(851.58,665.27) 854.02,662.83 926.58,662.83 L2.1@954.85,662.83 ; C18.2@626.78,339.77 C18.2@628.58,337.97
  Signal Layer 2 w7.87: v1(682,300) 689.65,307.65 v1(775.76,307.65) 789.76,293.65 v1(835.76,293.65)
  Signal Layer 2 w11.81: v3(96,122) 76,142 v6(76,423) 76,540.24 v1(168.58,632.83) 189.76,654 372.68,654 v1(398.58,628.1) 401.32,625.36 401.32,602.85 400.24,601.77 400.24,577.08 401.32,576 ; v1(565,594) 546.15,575.15 v1(513.58,575.15) 512.73,576 427.54,576 426.77,575.24 402.08,575.24 401.32,576 ; v1(606.58,356.83) 606.58,357.59 606.58,374.42 596,385 564,385 555,376 373,376 347,402 347,462.51 v1(401.32,516.83) 401.32,576 ; v1(771.58,699.56) 786.44,699.56 820.73,665.27 v1(851.58,665.27) ; 1066.83,571 1116,571 1136.85,591.85 v1(1136.85,622.83) ; v1(1166.85,397.83) 1168.68,396 1200.32,396 ; v1(1200.32,442.83) 1200.32,396 ; v1(1201.76,349.65) 1200.32,351.1 1200.32,396 ; v1(1260.32,372.83) 1260.32,396 ; v1(1260.32,417.83) 1260.32,396 ; 1200.32,396 1260.32,396
  Signal Layer 2 w25.59: v1(606.58,356.83) v1(628.58,356.83) ; v1@606.58,357.59 v1(626.78,377.79) ; 628.58,391.17 v1@628.58,375.99 ; v1(851.58,665.27) 995.73,665.27 1066.83,594.17 1066.83,571 1066.83,397.83 ; v1(1166.85,397.83) 1066.83,397.83 ; v1(626.78,377.79) v1@628.58,375.99 ; v1(626.78,377.79) 626.78,393.78 639,406 ; v1(628.58,356.83) 639,367.24 639,406 ; v1(628.58,356.83) v1@628.58,375.99 ; 639,406 639,463 674.83,498.83 v1(798.58,498.83) 808.17,498.83 847,460 847,373 866,354 1023,354 1066.83,397.83
  Bottom Layer w11.81: v6(76,423) 76.23,423.23 CARD1.4@123.03,423.23
  other v3: 664.58,242.83
BUZZ: Q3.1 U7.38 | length 860.8
  Top Layer w3.94: Q3.1@273.7,123.41 282,131.71 v1(282,146) ; v1(931,259) 964,259 1012.23,307.23 U7.38@1012.23,334.53
  Signal Layer 2 w3.94: v1(282,146) 288,140 519,140 545,166 647,166 746.65,265.65 747.95,264.36 925.64,264.36 v1(931,259)
CC1: C5.1 U1.C1 USB1.A5 USB2.A5 | length 2274.4
  Top Layer w4: C5.1@328.58,626.1 328.58,569.07 340.57,557.08 U1.C1@357.84,557.08
  Top Layer w5: v1(170,525) 174.21,520.79 v1(174.21,472.44) 280.89,472.44 281.28,472.83 USB1.A5@282.07,472.04 ; USB2.A5@1355.1,373.62 1383.79,373.62 v1(1393.76,363.65)
  Signal Layer 2 w3.94: v1(174.21,472.44) 154,452.23 154,373 182.06,344.94 182.06,328.06 154,300 154,186 239,101 309,101 387,23 568,23 587,42 1026,42 1249,265 1295.1,265 v1(1393.76,363.65)
  Signal Layer 2 w4: v1(170,525) 170,566 215,611 299,611 v1(315,627)
CC2: C6.2 U1.A1 USB1.B5 USB2.B5 | length 2434.2
  Top Layer w4: U1.A1@357.84,588.57 346,600.41 v1(346,602) 346,608.51 C6.2@363.58,626.1
  Top Layer w5: v1(165,338) 180.35,353.35 280.45,353.35 280.97,352.83 USB1.B5@282.07,353.93 ; USB2.B5@1355.1,491.73 1377.27,491.73 1390.17,478.83 v1(1396.58,478.83)
  Signal Layer 2 w3.94: v1(346,602) 220,602 187,569 187,516 143,472 143,360 v1(165,338) 143,316 143,183 234,92 303,92 380,15 574,15 591.83,32.83 1028.83,32.83 1252,256 1300,256 1385,341 1406,341 1417,352 1417,458.41 v1(1396.58,478.83)
CHIP_PU: C22.2 R11.1 SW2.2 U7.4 | length 669.1
  Top Layer w3.94: v1(533,679) 529.21,682.79 SW2.2@529.21,721.06 SW2.2@533.27,717 ; R11.1@771.58,666.1 772.85,664.83 v1(788.58,664.83) ; C22.2@805.32,664.83 C22.2@806.58,666.1
  Top Layer w4: U7.4@1027.72,602.18 1027.72,587.69 1037.76,577.65 v1(1037.76,571.65)
  Signal Layer 2 w4: v1(533,679) 547.17,664.83 665.83,664.83 679,678 775.41,678 v1(788.58,664.83) 797.17,664.83 816,646 866,646 897,615 1004,615 1037.76,581.24 v1(1037.76,571.65)
EUSB_N: U3.2 U7.25 | length 42
  Top Layer w5: U3.2@798.5,412.7 800.39,410.82 819.55,410.82 821.93,413.19 U7.25@838.74,413.19
EUSB_P: U3.1 U7.26 | length 44.6
  Top Layer w5: U3.1@796.83,397.44 796.83,396.96 799.7,399.83 819.55,399.83 821.93,397.45 U7.26@838.74,397.45
EXT_ADC: U7.6
EXT_IO1: U7.39
EXT_IO2: U7.40
EXT_IO3: U7.41
EXT_IO4: U7.42
EXT_IO5: U7.43 | length 7.1
  Top Layer w5: U7.43@1106.45,365.95 U7.43@1113.53,365.95
FU_INT: R21.2 U1.B2 U7.37 | length 1288
  Top Layer w3.94: v1(928,297) 951,274 967.78,274 996.22,302.45 U7.37@996.22,334.46
  Top Layer w5: v1(346.58,572.83) U1.B2@373.59,572.82 ; v1(428,661) 436.81,652.19 R21.2@436.81,634.88 R21.2@438.54,634.88
  Bottom Layer w3.94: v1(428,661) 428,659 403,684 318,684 300.17,666.17 300.17,619.24 v1(346.58,572.83) 375,544.41 375,482 355,462 355,383 414,324 624,324 686.35,261.65 v1(713.76,261.65) 728.1,276 895,276 916,297 v1(928,297)
G0: C23.1 SW3.2 U7.5 | length 861.1
  Top Layer w3.94: v1(273,689) 273,720.83 SW3.2@273.23,721.06
  Top Layer w4: U7.5@1011.97,602.18 1011.97,579.44 v1(1013.76,577.65)
  Signal Layer 2 w4: v1(273,689) 491,689 525,655 698,655 703,660 v1(731,660) ; v1@726,655 v1(731,660) ; v1(1013.76,577.65) 1013.76,587.24 995,606 892,606 860,638 811,638 800,649 776,649 765,660 v1(731,660)
G2: CN1.8 U7.7 | length 661
  Top Layer w3.94: CN1.8@494.17,379.92 494.18,394.42 498.11,398.36 498.11,408.36 v1(502.58,412.83) ; U7.7@980.47,602.18 980.47,588.94 985,584.41 v1(985,560)
  Signal Layer 2 w3.94: v1(502.58,412.83) 502.58,422.58 636,556 793,556 831,518 937.22,518 979.22,560 v1(985,560)
G3: CN1.7 U7.8 | length 656.4
  Top Layer w3.94: CN1.7@478.43,379.92 v1(478.43,399.6) ; U7.8@964.72,602.18 964.72,582.69 v1(968.58,578.83)
  Signal Layer 2 w3.94: v1(478.43,399.6) 478.43,410.43 632,564 799,564 837,526 932,526 968.58,562.58 v1(968.58,578.83)
G4: CN1.6 U7.9 | length 656.1
  Top Layer w3.94: CN1.6@462.68,379.92 v1(462.68,422.83)
  Top Layer w4: U7.9@948.98,602.18 948.98,567.82 v1(949.49,567.32)
  Signal Layer 2 w3.94: v1(462.68,422.83) 477.83,422.83 628,573 802,573 840,535 917.17,535 v1(949.49,567.32)
G5: CN1.5 U7.10 | length 652.4
  Top Layer w3.94: CN1.5@446.93,379.92 v1(446.93,399.6)
  Top Layer w4: v1(932.58,580.83) 933.23,581.48 U7.10@933.23,602.18
  Signal Layer 2 w4: v1(446.93,399.6) 446.93,431.93 455,440 483,440 624,581 807,581 845,543 894.76,543 v1(932.58,580.83)
G6: CN1.4 U7.11 | length 653.6
  Top Layer w3.94: CN1.4@431.18,379.92 v1(431.18,422.83)
  Top Layer w4: v1(880,560) 904,560 917.48,573.48 U7.11@917.48,602.18
  Signal Layer 2 w3.94: v1(431.18,422.83) 431.18,434.18 445,448 479,448 621,590 811,590 841,560 v1(880,560) v1@881.76,560
G7: CN1.3 U7.12 | length 643.9
  Top Layer w3.94: CN1.3@415.43,379.92 v1(415.43,399.6)
  Top Layer w4: v1(900.58,580.83) 900.58,601.03 U7.12@901.73,602.18
  Signal Layer 2 w4: v1(415.43,399.6) 415.43,440.43 431,456 475,456 617,598 816,598 838,576 895.76,576 v1(900.58,580.83)
G8: CN1.2 U7.13 | length 640.4
  Top Layer w3.94: CN1.2@399.69,379.92 v1(399.69,422.83)
  Top Layer w4: v1(849,594) 849,589 856,582 876,582 885.98,591.98 U7.13@885.98,602.18
  Signal Layer 2 w3.94: v1(399.69,422.83) 399.69,436.69 427,464 471.73,464 613.73,606 821,606 833,594 v1(849,594)
G9: CN1.1 U7.14 | length 628.8
  Top Layer w3.94: CN1.1@383.94,379.92 v1(383.94,399.6)
  Top Layer w4: v1(839,616) 866,616 870.24,611.76 U7.14@870.24,602.18
  Signal Layer 2 w4: v1(383.94,399.6) 383.94,433.94 423,473 469.46,473 610.46,614 839.41,614 839,614.41 v1(839,616)
G10: CN1.9 U7.15 | length 457.1
  Top Layer w4: CN1.9@509.92,379.92 509.92,388.92 536,415 558.76,415 572.55,428.8 572.55,489.55 663.83,580.83 811.27,580.83 821.43,570.67 U7.15@838.74,570.67
G11: CN1.10 U7.16 | length 443.4
  Top Layer w4: CN1.10@525.67,379.92 525.67,390.67 541,406 565.76,406 580.58,420.83 580.58,486.27 665.14,570.83 806.58,570.83 822.48,554.93 U7.16@838.74,554.93
G12: CN1.11 U7.17 | length 429.5
  Top Layer w4: CN1.11@541.42,379.92 541.42,391.42 548,398 571.76,398 588.6,414.84 588.6,482.97 668.46,562.83 793.92,562.83 817.56,539.18 U7.17@838.74,539.18